# Altium PCB pcb.PcbDoc
Units mm, origin at the board's own origin, x right, y up, seen from the top; angles counter-clockwise.
Board outline 152.4 x 101.6 mm, 2 copper layers (Top Layer, Bottom Layer); 25 components, 52 nets, 222 pads, 1 vias.
Unrouted connection lines stored in the file: 133.
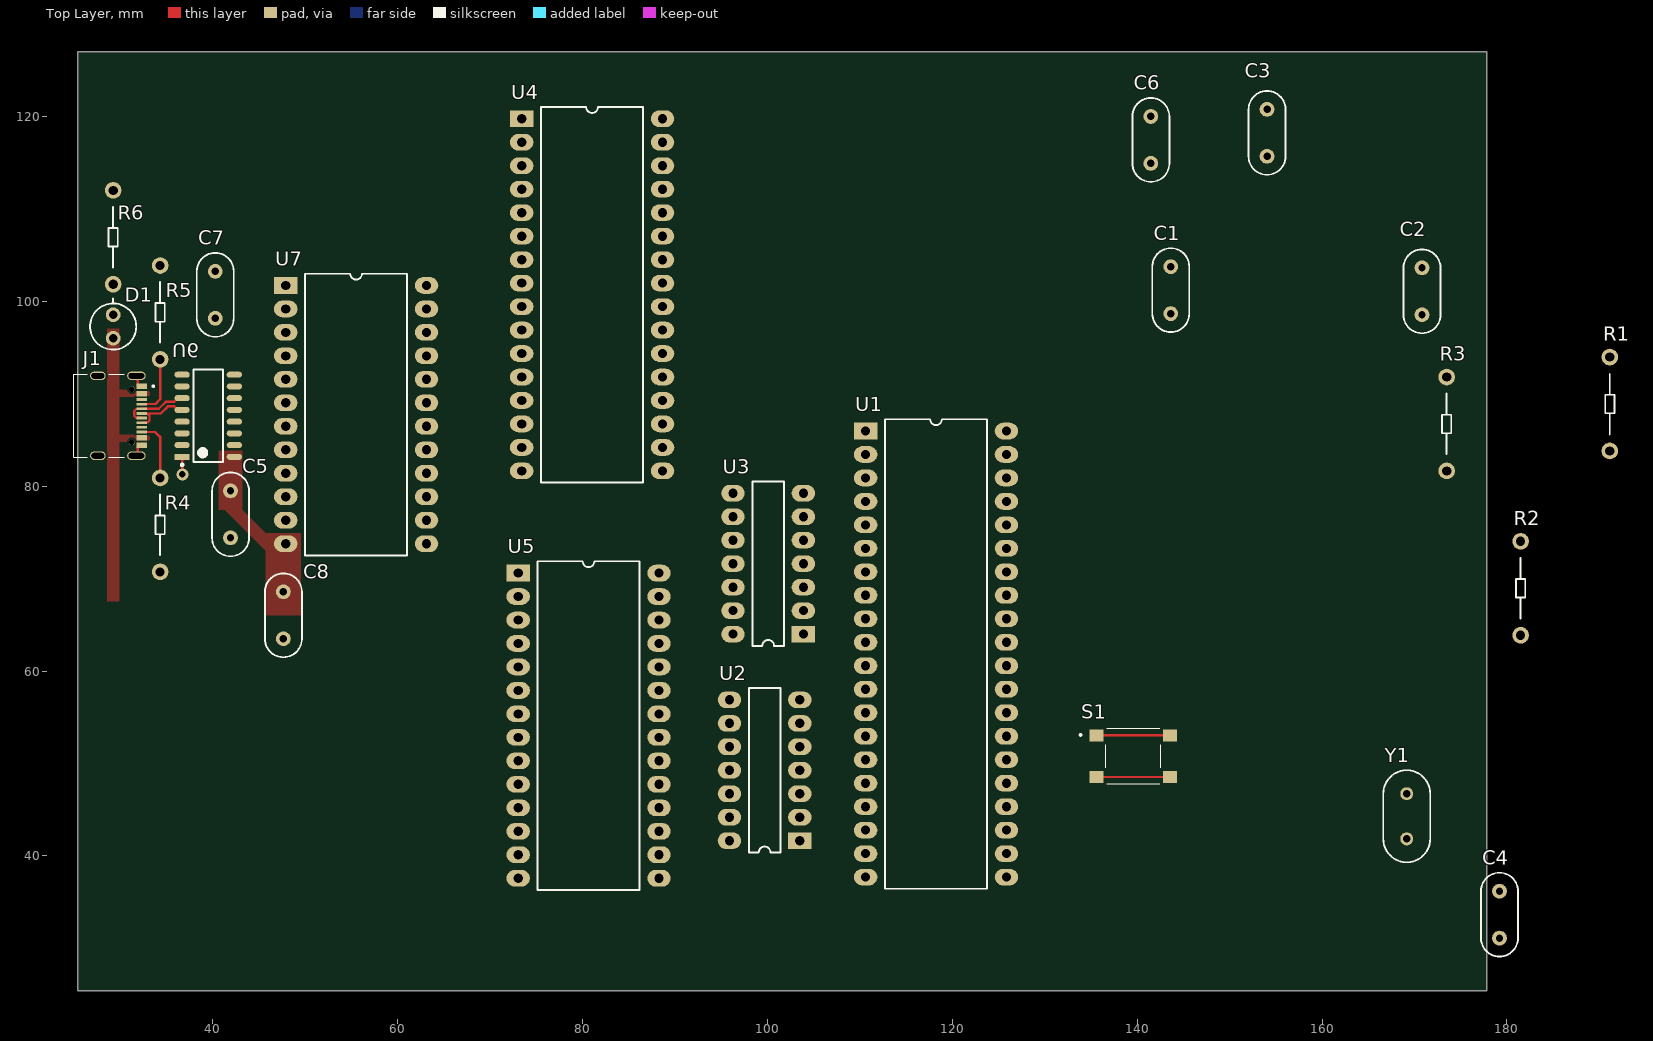
[diagram p0: Top Layer view]
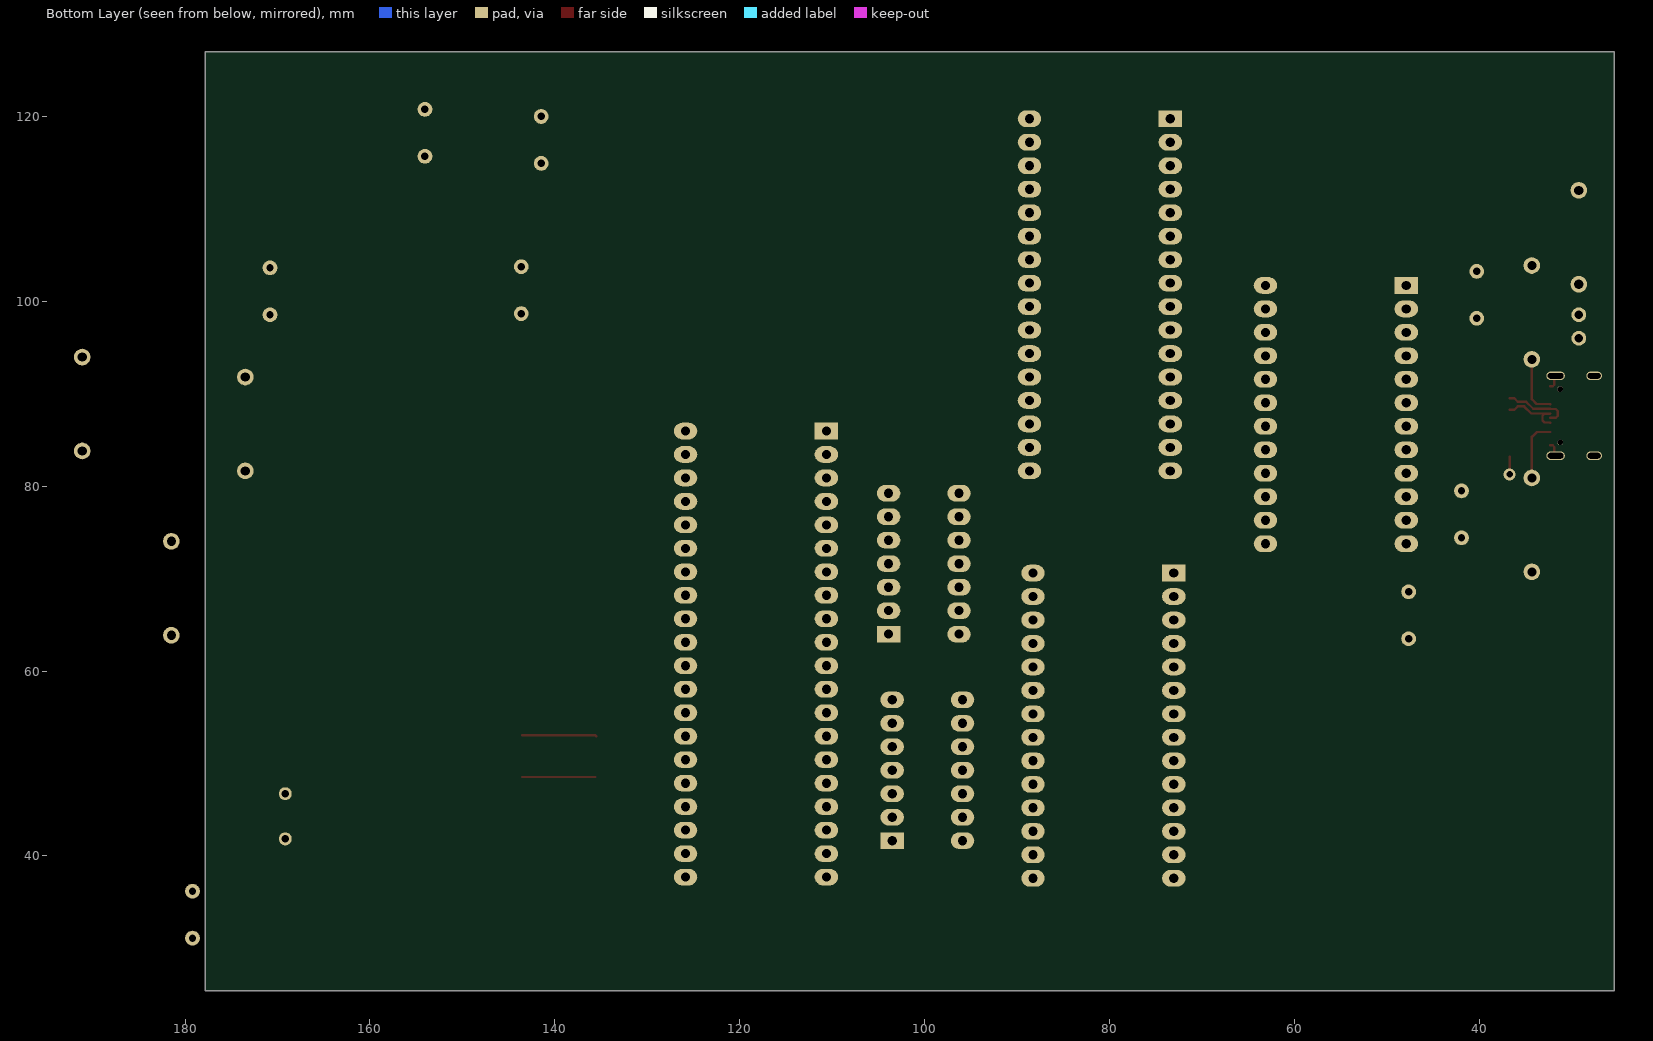
[diagram p1: Bottom Layer view, seen from below]

## Layer stack, top to bottom
Top Solder: solder mask 0.0102, Solder Resist, Dk 3.5
Top Layer: signal copper 0.0356
Dielectric 1: dielectric 0.32, FR-4, Dk 4.8
Bottom Layer: signal copper 0.0356
Bottom Solder: solder mask 0.0102, Solder Resist, Dk 3.5

## Board outline
25.4,25.4 177.8,25.4 177.8,127 25.4,127

## Design rules (kind name [scope] priority, off if disabled: settings)
Clearance [All] p1: gap=0.254 ignorepadtopadclearanceinfootprint=TRUE except(0.1: Arc-Arc Arc-Track Arc-SMDPad Arc-Text Track-Track Track-SMDPad Track-Text SMDPad-Text THPad-Text Via-Text Fill-Text Poly-Text Region-Text Text-Text; 0.15: SMDPad-SMDPad; 0.2: Arc-Via Track-Via SMDPad-Via THPad-Via Via-Via; 0.28: Arc-THPad Track-THPad SMDPad-THPad THPad-THPad)
DiffPairsRouting USB [InDifferentialPair('USB_D')  Or  InDifferentialPair('USBCONN_D')] p1: maxlimit=0.108 minlimit=0.108 mostfreqgap=0.108 toplayer_minwidth=0.254 toplayer_maxwidth=0.254 toplayer_prefwidth=0.254 bottomlayer_minwidth=0.254 bottomlayer_maxwidth=0.254 bottomlayer_prefwidth=0.254 impedanceprofiledriven=TRUE impedanceprofileid={E954FBB0-E8BE-4F79-B3D0-67D09CE491D3} maxuncoupledlength=12.7
DiffPairsRouting DiffPairsRouting_1 [All] p2: maxlimit=0.254 minlimit=0.1 mostfreqgap=0.254 toplayer_minwidth=0.1 toplayer_maxwidth=1 toplayer_prefwidth=0.254 bottomlayer_minwidth=0.1 bottomlayer_maxwidth=1 bottomlayer_prefwidth=0.254 maxuncoupledlength=12.7
PlaneConnect [All] p1: planeconnectstyle=Direct reliefexpansion=0.508 reliefentries=4 reliefconductorwidth=0.254 reliefairgap=0.254
PolygonConnect PolygonConnect_1 [All] p1: connectstyle=Direct reliefconductorwidth=0.254 reliefentries=4 polygonreliefangle="90 Angle" airgapwidth=0.254
PolygonConnect [All] p2: connectstyle=Direct reliefconductorwidth=0.254 reliefentries=4 polygonreliefangle="90 Angle" airgapwidth=0.254
RoutingVias [All] p1: holewidth=0.711 width=1.27 viastyle="Through Hole" minholewidth=0.711 minwidth=1.27 maxholewidth=0.711 maxwidth=1.27
SolderMaskExpansion [All] p1: expansion=0.102 istentingtop=FALSE
SupplyNets "Schematic Supply Nets_4" [InNet('GND')] p1: voltage=0.000
SupplyNets "Schematic Supply Nets_6" [InNet('ISO_GND2')] p2: voltage=0.000
SupplyNets "Schematic Supply Nets_5" [InNet('ISO_GND1')] p3: voltage=0.000
SupplyNets "Schematic Supply Nets_3" [InNet('VBUS')] p4: voltage=0.000
SupplyNets "Schematic Supply Nets_2" [InNet('+5V')] p5: voltage=0.000
SupplyNets "Schematic Supply Nets_1" [InNet('+5V_EXT')] p6: voltage=0.000
SupplyNets "Schematic Supply Nets" [InNet('+3.3V')] p7: voltage=0.000
Width [All] p1: maxlimit=1 minlimit=0.1 preferedwidth=0.254
28 further rules are at their usual default settings.

## Classes and differential pairs
component class z80: C1 C2 C3 R1 R2 R3 S1 U1 U2 Y1
component class uart: C6 C7 C8 D1 J1 R4 R5 R6 U6 U7
component class memory: C4 C5 U3 U4 U5
differential pair USB: +USB_P -USB_N

## Components (designator, comment, footprint, x,y, rotation, side; value= is the part's Value field where it differs from the comment)
C1 "22 pF" Capacitor 143.637,98.679 r90 top
C2 "22 pF" Capacitor 170.815,98.552 r90 top
C3 "0.1 µF" Capacitor 154.051,115.697 r90 top
C4 "0.1 µF" Capacitor 179.197,31.115 r90 top
C5 "0.1 µF" Capacitor 41.91,74.422 r90 top
C6 "0.1 µF" Capacitor 141.478,114.935 r90 top
C7 "0.1 µF" Capacitor 40.259,98.171 r90 top
C8 "0.1 µF" Capacitor 47.625,68.58 r270 top
D1 "LED" DIODE 29.21,96.012 r90 top
J1 "TYPE-C-31-M-12" HRO_TYPE-C-31-M-12 27.559,87.63 r270 top
R1 "1 MΩ" "Axial 0.4" 191.135,83.82 r90 top
R2 "10 kΩ" "Axial 0.4" 181.483,63.881 r90 top
R3 "1 kΩ" "Axial 0.4" 173.482,81.661 r90 top
R4 "5.1 kΩ" "Axial 0.4" 34.29,70.739 r90 top
R5 "5.1 kΩ" "Axial 0.4" 34.29,103.886 r270 top
R6 "1 kΩ" "Axial 0.4" 29.21,112.014 r270 top
S1 "SWITCH" SW_PTS645SL43SMTR92LFS 139.573,50.8 r0 top
U1 "Z84C0010PEC" DIP40 110.617,85.979 r0 top
U2 "74LS04" DIP14 103.505,41.656 r180 top
U3 "74LS32" DIP14 103.886,64.008 r180 top
U4 "HM628128BLP-10" DIP32 73.406,119.761 r0 top
U5 "AT28C256-15PU" DIP28 73.025,70.612 r0 top
U6 "CH340C" SOP127P600X175-16M 39.497,87.63 r0 top
U7 "MC68B50P" DIP24 47.879,101.727 r0 top
Y1 "7.3728 MHz" HC49S 169.164,41.856 r90 top

## Footprints (in the part's own frame and the unit in brackets; to place one, negate y for a bottom-side part, rotate by r counter-clockwise, add the part's x,y. Pads: shape width x height; smd on the part's side, far side on the other; paste and mask are expansions set on the pad)
"Axial 0.4" [mm]
  round 1.8 hole 1: 1(0,0) 2(10.16,0)
  silkscreen extent 1.8,-0.5 8.36,0.5
Capacitor [mm]
  round 1.6 hole 0.8: 1(0,0) 2(5.08,0)
  silkscreen extent -2,-2 7.08,2
DIODE [mm]
  round 1.6 hole 0.9: A(0,0) K(2.54,0)
  silkscreen extent -1.23,-2.5 4.32,2.5
DIP14 [mm]
  rect 2.54x1.8 hole 1: 1(0,0)
  oval 2.54x1.8 hole 1: 2(0,-2.54) 3(0,-5.08) 4(0,-7.62) 5(0,-10.16) 6(0,-12.7) 7(0,-15.24) 8(7.62,-15.24) 9(7.62,-12.7) 10(7.62,-10.16) 11(7.62,-7.62) 12(7.62,-5.08) 13(7.62,-2.54) 14(7.62,0)
  silkscreen extent 2.1,-16.51 5.52,1.27
DIP24 [mm]
  rect 2.54x1.8 hole 1: 1(0,0)
  oval 2.54x1.8 hole 1: 2(0,-2.54) 3(0,-5.08) 4(0,-7.62) 5(0,-10.16) 6(0,-12.7) 7(0,-15.24) 8(0,-17.78) 9(0,-20.32) 10(0,-22.86) 11(0,-25.4) 12(0,-27.94) 13(15.24,-27.94) 14(15.24,-25.4) 15(15.24,-22.86) 16(15.24,-20.32) 17(15.24,-17.78) 18(15.24,-15.24) 19(15.24,-12.7) 20(15.24,-10.16) 21(15.24,-7.62) 22(15.24,-5.08) 23(15.24,-2.54) 24(15.24,0)
  silkscreen extent 2.1,-29.21 13.14,1.27
DIP28 [mm]
  rect 2.54x1.8 hole 1: 1(0,0)
  oval 2.54x1.8 hole 1: 2(0,-2.54) 3(0,-5.08) 4(0,-7.62) 5(0,-10.16) 6(0,-12.7) 7(0,-15.24) 8(0,-17.78) 9(0,-20.32) 10(0,-22.86) 11(0,-25.4) 12(0,-27.94) 13(0,-30.48) 14(0,-33.02) 15(15.24,-33.02) 16(15.24,-30.48) 17(15.24,-27.94) 18(15.24,-25.4) 19(15.24,-22.86) 20(15.24,-20.32) 21(15.24,-17.78) 22(15.24,-15.24) 23(15.24,-12.7) 24(15.24,-10.16) 25(15.24,-7.62) 26(15.24,-5.08) 27(15.24,-2.54) 28(15.24,0)
  silkscreen extent 2.1,-34.29 13.14,1.27
DIP32 [mm]
  rect 2.54x1.8 hole 1: 1(0,0)
  oval 2.54x1.8 hole 1: 2(0,-2.54) 3(0,-5.08) 4(0,-7.62) 5(0,-10.16) 6(0,-12.7) 7(0,-15.24) 8(0,-17.78) 9(0,-20.32) 10(0,-22.86) 11(0,-25.4) 12(0,-27.94) 13(0,-30.48) 14(0,-33.02) 15(0,-35.56) 16(0,-38.1) 17(15.24,-38.1) 18(15.24,-35.56) 19(15.24,-33.02) 20(15.24,-30.48) 21(15.24,-27.94) 22(15.24,-25.4) 23(15.24,-22.86) 24(15.24,-20.32) 25(15.24,-17.78) 26(15.24,-15.24) 27(15.24,-12.7) 28(15.24,-10.16) 29(15.24,-7.62) 30(15.24,-5.08) 31(15.24,-2.54) 32(15.24,0)
  silkscreen extent 2.1,-39.37 13.14,1.27
DIP40 [mm]
  rect 2.54x1.8 hole 1: 1(0,0)
  oval 2.54x1.8 hole 1: 2(0,-2.54) 3(0,-5.08) 4(0,-7.62) 5(0,-10.16) 6(0,-12.7) 7(0,-15.24) 8(0,-17.78) 9(0,-20.32) 10(0,-22.86) 11(0,-25.4) 12(0,-27.94) 13(0,-30.48) 14(0,-33.02) 15(0,-35.56) 16(0,-38.1) 17(0,-40.64) 18(0,-43.18) 19(0,-45.72) 20(0,-48.26) 21(15.24,-48.26) 22(15.24,-45.72) 23(15.24,-43.18) 24(15.24,-40.64) 25(15.24,-38.1) 26(15.24,-35.56) 27(15.24,-33.02) 28(15.24,-30.48) 29(15.24,-27.94) 30(15.24,-25.4) 31(15.24,-22.86) 32(15.24,-20.32) 33(15.24,-17.78) 34(15.24,-15.24) 35(15.24,-12.7) 36(15.24,-10.16) 37(15.24,-7.62) 38(15.24,-5.08) 39(15.24,-2.54) 40(15.24,0)
  silkscreen extent 2.1,-49.53 13.14,1.27
HC49S [mm]
  round 1.4 hole 0.8: 1(0,0) 2(4.88,0)
  silkscreen extent -2.54,-2.54 7.42,2.54
HRO_TYPE-C-31-M-12 [mm]
  rect 0.6x1.14 smd mask+0.05: A1_B12(-3.2,4.75) A4_B9(-2.4,4.75) B1_A12(3.2,4.75) B4_A9(2.4,4.75)
  rect 0.3x1.14 smd mask+0.05: A5(-1.25,4.75) A6(-0.25,4.75) A7(0.25,4.75) A8(1.25,4.75) B5(1.75,4.75) B6(0.75,4.75) B7(-0.75,4.75) B8(-1.75,4.75)
  oval 0.9x2 hole 0.6 slot 1.7 at 90 deg: S1(-4.325,4.17) S2(4.325,4.17)
  oval 0.9x1.7 hole 0.6 slot 1.4 at 90 deg: S3(-4.325,0) S4(4.325,0)
  round 0.6 hole 0.6 unplated: ""(-2.89,3.68) ""(2.89,3.68)
  silkscreen extent -4.47,-2.6 4.47,6.1, body extent -4.47,-2.6 4.47,5.31, height 3.31
SOP127P600X175-16M [mm] "SOP, 16-Leads, Body 9.90x3.90mm, Pitch 1.27mm, IPC Low Density"
  rect 1.65x0.65 smd: 1(-2.825,-4.445)
  oval 1.65x0.65 smd: 2(-2.825,-3.175) 3(-2.825,-1.905) 4(-2.825,-0.635) 5(-2.825,0.635) 6(-2.825,1.905) 7(-2.825,3.175) 8(-2.825,4.445) 9(2.825,4.445) 10(2.825,3.175) 11(2.825,1.905) 12(2.825,0.635) 13(2.825,-0.635) 14(2.825,-1.905) 15(2.825,-3.175) 16(2.825,-4.445)
  silkscreen extent -2.95,-5.44 1.6,5, body extent -3,-5 3,5, height 1.75
SW_PTS645SL43SMTR92LFS [mm]
  rect 1.55x1.3 smd: 1(-3.975,2.25) 2(3.975,2.25) 3(-3.975,-2.25) 4(3.975,-2.25)
  silkscreen extent -5.8,-3 3,3, body extent -4.5,-3 4.5,3, height 4.3

## Part data
C1 C2 C3 C4 C5 C6 C7 C8: library part CAPACITOR, Package="MOLDED-2 Panasonic", Availability="In Stock", Check_prices=https://www.snapeda.com/parts/ECWFG70105K/Panasonic/view-part/?ref=eda, MF=Panasonic, MP=ECWFG70105K, Price=None, Purchase-URL=https://pricing.snapeda.com/search/part/ECWFG70105K/?ref=eda, SnapEDA_Link=https://www.snapeda.com/parts/ECWFG70105K/Panasonic/view-part/?ref=snap
J1: Package=Package, Check_prices=https://www.snapeda.com/parts/TYPE-C-31-M-12/HRO+Electronics+Co.%252C+Ltd./view-part/?ref=eda, MF="HRO Electronics Co., Ltd.", MP=TYPE-C-31-M-12, SnapEDA_Link=https://www.snapeda.com/parts/TYPE-C-31-M-12/HRO+Electronics+Co.%252C+Ltd./view-part/?ref=snap
R1 R2 R3 R4 R5 R6: library part RESISTOR, Package=None, Availability=Unavailable, MP=ERJU01J131C, Price=None
S1: Package=None, Check_prices=https://www.snapeda.com/parts/SKRPABE010/ALPS/view-part/?ref=eda, MF=ALPS, MP=SKRPABE010, SnapEDA_Link=https://www.snapeda.com/parts/SKRPABE010/ALPS/view-part/?ref=snap
U2: "Hex Inverters"
Y1: library part CRYSTAL, Package=None, Check_prices=https://www.snapeda.com/parts/LFXTAL003056B/IQD+Frequency+Products/view-part/?ref=eda, MF="IQD Frequency Products", MP=LFXTAL003056B, SnapEDA_Link=https://www.snapeda.com/parts/LFXTAL003056B/IQD+Frequency+Products/view-part/?ref=snap

## Via types
v1: diameter 1.27, hole 0.711, Top Layer to Bottom Layer, 1 vias

## Nets (pads, with @x,y where several pads share a name; then routed paths per layer and width w, separated by ;. In a path a pad name is that pad's centre, name@x,y a point inside that pad or via, vN(x,y) a via of type N, cw(c..) or ccw(c..) an arc to the next point about the centre after c; other vN are vias at no path point)
+5: C4.2 C5.2 C6.2 C8.1 D1.A J1.A4_B9 J1.B4_A9 R2.2 U1.17 U1.24 U1.25 U2.9 U2.11 U2.13 U2.14 U3.14 U4.32 U5.27 U5.28 U6.16 U7.12
\INT: U1.16 U7.7
\IORQ: U1.20 U2.5
\M1: U1.27 U7.8
\MEMRD: U3.6 U4.24 U5.22
\MEMWR: U3.3 U4.29
\MREQ: U1.19 U3.1 U3.4
\RD: U1.21 U3.5
\ROM: U3.11 U4.30
\RST: R2.1 S1.1 S1.2 U1.26 | length 8.1
  Top Layer w0.254: S1.1@135.507,52.959 S1.1 S1.2
\RTS: U6.9 U7.5
\WR: U1.22 U3.2 U7.13
A0: U1.30 U4.12 U5.10 U7.11
A1: U1.31 U4.11 U5.9
A2: U1.32 U4.10 U5.8
A3: U1.33 U4.9 U5.7
A4: U1.34 U4.8 U5.6
A5: U1.35 U4.7 U5.5
A6: U1.36 U4.6 U5.4 U7.9
A7: U1.37 U4.5 U5.3 U7.10
A8: U1.38 U4.27 U5.25
A9: U1.39 U4.26 U5.24
A10: U1.40 U4.23
A11: U1.1 U4.25 U5.23
A12: U1.2 U4.4 U5.2
A13: U1.3 U3.9 U4.28
A14: U1.4 U3.10 U4.3
A15: U1.5 U3.13 U4.31
CLK: U1.6 U2.4 U7.3 U7.4
D0: U1.14 U4.13 U5.13 U7.22
D1: U1.15 U4.14 U7.21
D2: U1.12 U4.15 U5.15 U7.20
D3: U1.8 U4.17 U5.17 U7.19
D4: U1.7 U4.18 U5.18 U7.18
D5: U1.9 U4.19 U5.19 U7.17
D6: U1.10 U4.20 U5.20 U7.16
D7: U1.13 U4.21 U5.21 U7.15
GND: C1.1 C2.1 C3.2 C4.1 C5.1 C6.1 C7.2 C8.2 J1.A1_B12 J1.B1_A12 J1.S1 J1.S2 J1.S3 J1.S4 R4.1 R5.1 R6.1 S1.3 S1.4 U1.29 U2.7 U3.7 U4.2 U4.16 U4.22 U5.1 U5.14 U5.26 U6.1 U7.1 U7.23 U7.24 | length 12.9
  Top Layer w0.254: J1.S2 31.866,83.442 31.866,84.257 32.039,84.43 J1.B1_A12 ; J1.S1 31.866,91.818 31.866,91.003 32.039,90.83 J1.A1_B12 ; U6.1 36.703,83.154 v1(36.703,81.28) ; S1.3 S1.4
NetC1_2: C1.2 R1.2 U2.1 Y1.1
NetC2_2: C2.2 R3.1 Y1.2
NetC3_1: C3.1 U1.11
NetC7_1: C7.1 U6.4
NetD1_K: D1.K R6.2
NetJ1_A5: J1.A5 R5.2 | length 6.5
  Top Layer w0.254: J1.A5 32.329,88.9 33.782,88.9 34.29,89.408 R5.2
NetJ1_B5: J1.B5 R4.2 | length 6.6
  Top Layer w0.254: J1.B5 33.754,85.88 34.29,85.344 R4.2
NetR1_1: R1.1 R3.2 U2.2 U2.3
NetU2_6: U2.6 U7.14
NetU3_8: U3.8 U3.12
RX: U6.2 U7.2
TX: U6.3 U7.6
USB_N: J1.A7 J1.B7 U6.6 | length 7.2
  Top Layer w0.254: J1.A7 32.286,87.403 31.723,87.403 31.496,87.63 31.496,88.138 31.715,88.357 32.286,88.357 J1.B7 32.317,88.388 34.151,88.388 34.917,89.154 35.825,89.154 36.206,89.535 U6.6
USB_P: J1.A6 J1.B6 U6.5 | length 7.2
  Top Layer w0.254: J1.B6 32.332,86.903 32.928,86.903 33.147,87.122 33.147,87.63 32.92,87.857 32.332,87.857 J1.A6 34.361,87.88 35.127,88.646 35.825,88.646 36.206,88.265 U6.5
pads on no net: J1. J1.A8 J1.B8 U1.18 U1.23 U1.28 U2.8 U2.10 U2.12 U4.1 U5.11 U5.12 U5.16 U6.7 U6.8 U6.10 U6.11 U6.12 U6.13 U6.14 U6.15

## Polygon pours and split planes (outlines as drawn)
+5 on Top Layer "+5_L01_P001" (solid, pour order 1): 43.18,77.47 45.72,74.93 49.53,74.93 49.53,66.04 45.72,66.04 45.72,73.025 41.275,77.47 40.64,77.47 40.64,83.82 43.18,83.82
+5 on Top Layer "+5_L01_P000" (solid, pour order 0): 28.575,67.564 29.845,67.564 29.845,84.836 33.147,84.836 33.147,85.598 29.845,85.598 29.845,89.662 33.147,89.662 33.147,90.424 29.845,90.424 29.845,97.028 28.575,97.028

## Text inside footprints (layer, text, board x,y; h text height)
J1: Mechanical 13 "PCB EDGE" at 25.659,82.43 h0.61 r270